# EAGLE board schaltplan_v2 (EAGLE 6.3)
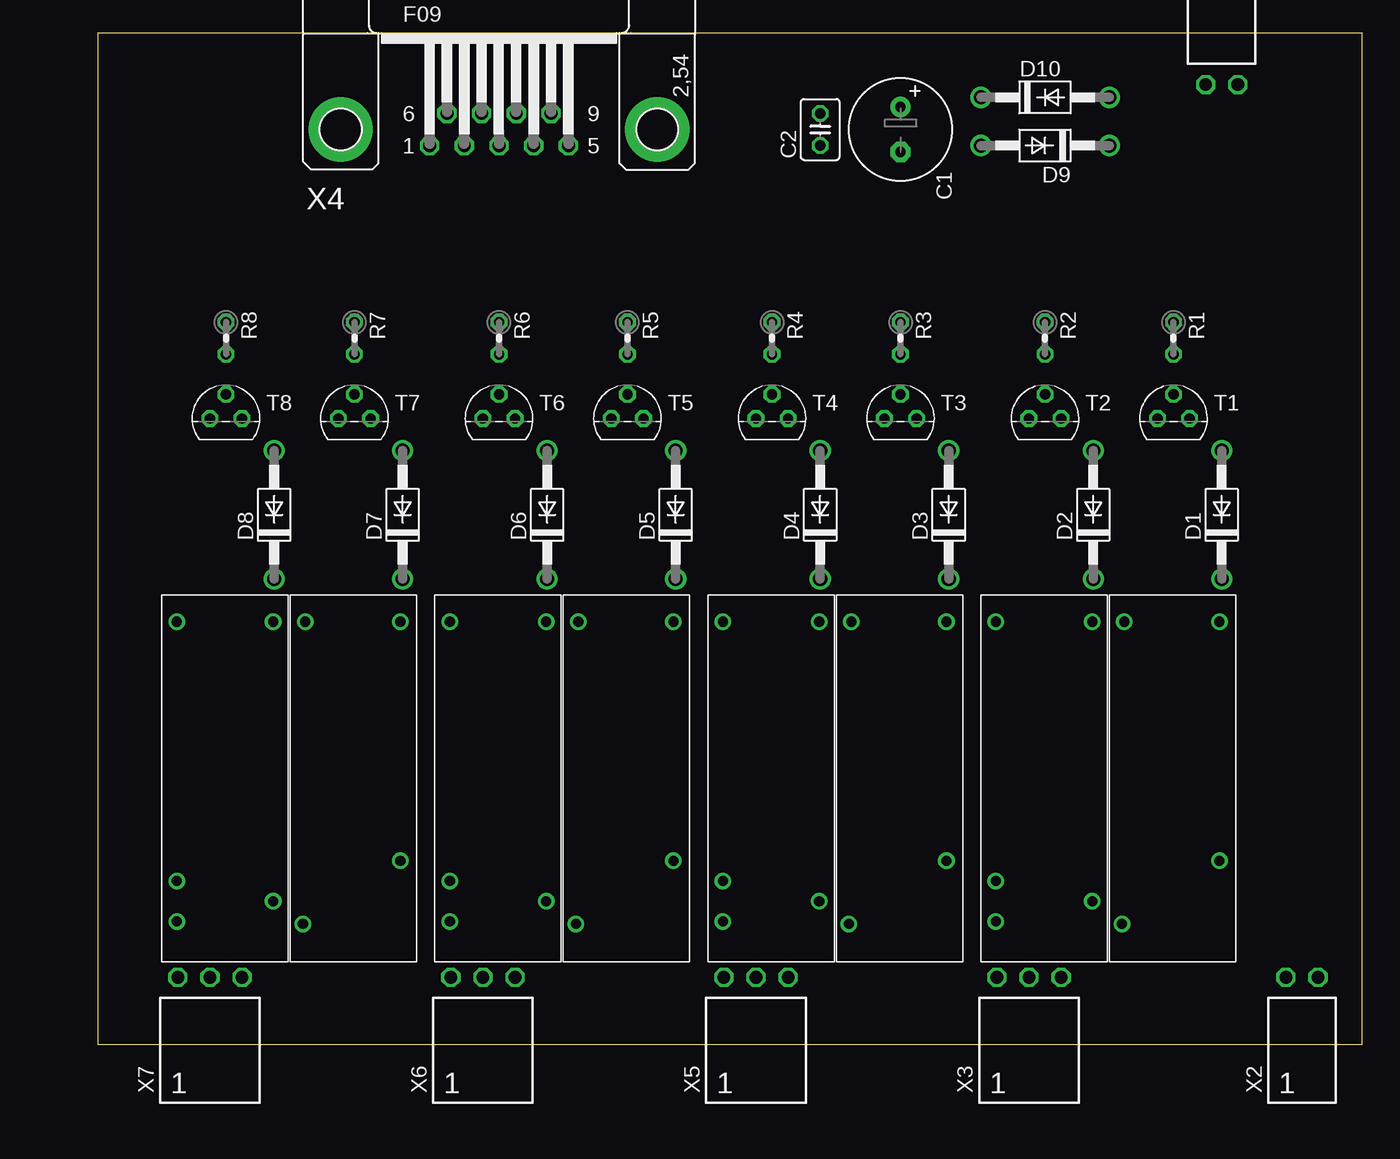
[diagram p0: board, top side]
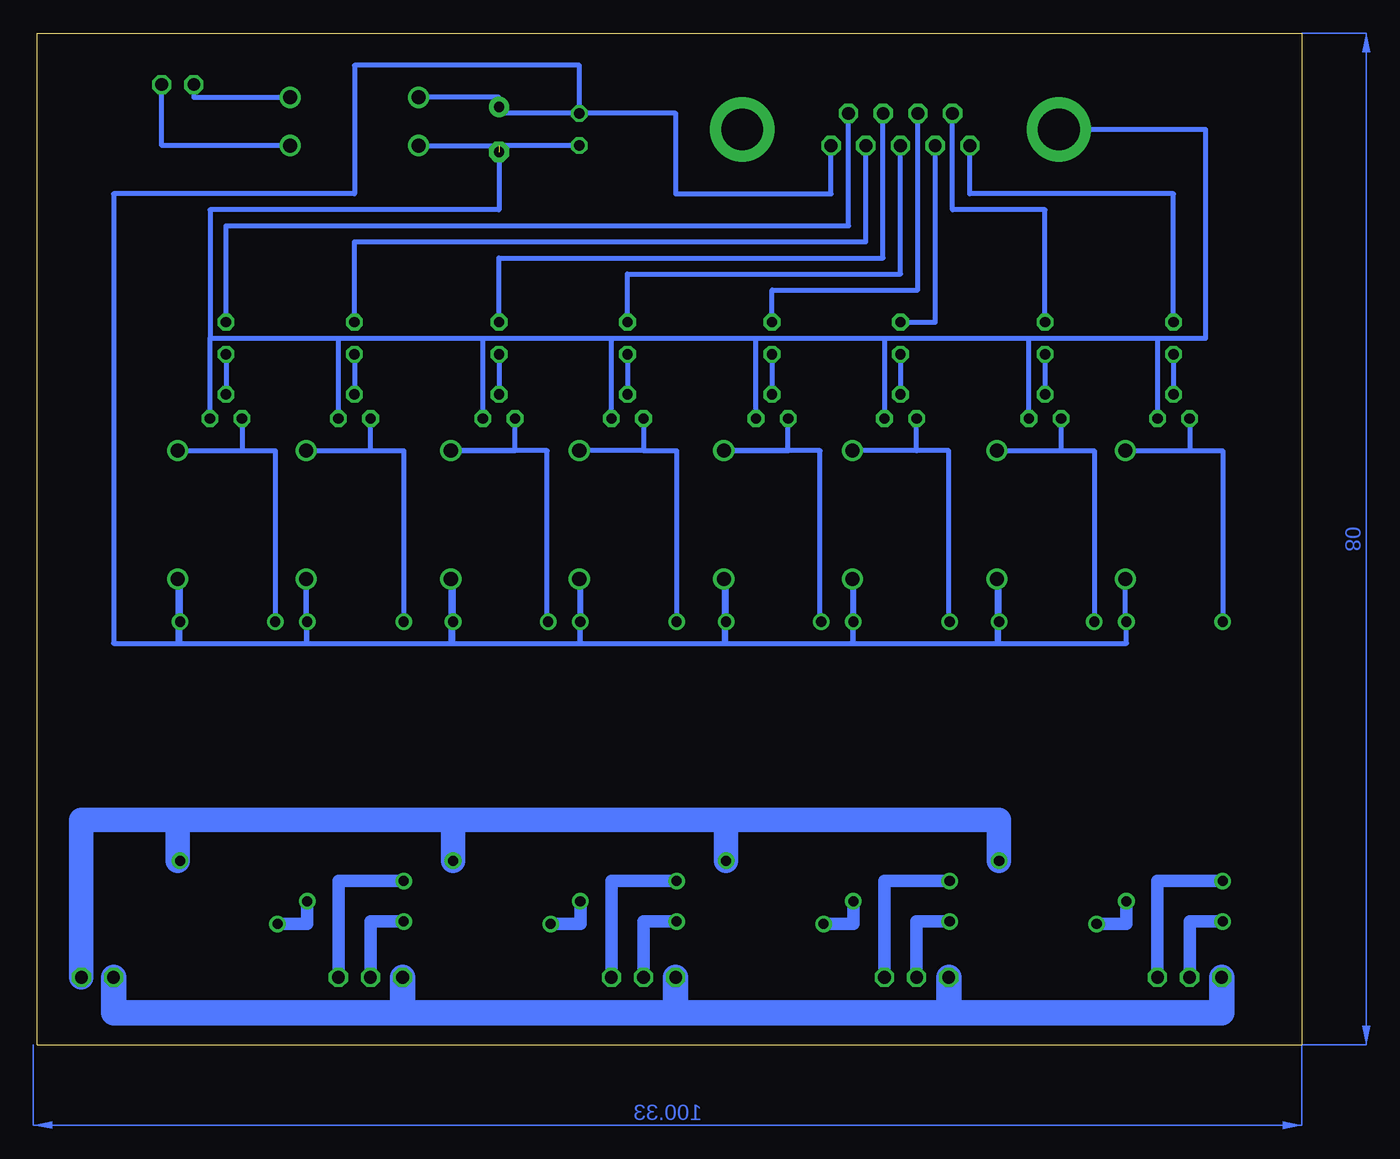
[diagram p1: board, bottom side, seen from below]

Size 100 x 80.01 mm. Coordinates in mm from the lower left corner, seen from the top.
Outline: 100,0.01 100,80.01 0,80.01 0,0.01
Outline: 100,0 0,0
Copper layers (1*16): Top 0.035mm / dielectric 1.5mm / Bottom 0.035mm
Design rules "default": minimum track width 10mil, minimum drill 24mil, track to track 8mil, track to pad 8mil, pad to pad 8mil, via to via 8mil, smd to smd 8mil, copper to edge 40mil, drill to drill 8mil, minimum pad ring 10mil, minimum via ring 8mil, stop-mask expansion 4mil, vias tented up to drill 0mil, thermal gap 10mil

## Footprints (pad centres in the part's own frame; a part is rotated, then mirrored left to right if it is on the bottom)
E3,5-8 = drill 0.813 pad 1.6: + -1.778,0 | drill 0.813 pad 1.6 octagon: - 1.778,0
C025-030X050 = drill 0.813 octagon: 1 -1.27,0; 2 1.27,0
DO41-10 = drill 1.118: A 5.08,0; C -5.08,0
0204V = drill 0.813 octagon: 1 -1.27,0; 2 1.27,0
TO92 = drill 0.813 octagon: 1 1.27,0; 2 0,1.905; 3 -1.27,0
JS_05_MN_KT = drill 0.8: P$1 2.1,1.19; P$2 2.1,8.71; P$3 21,8.71; P$4 26,1
JS_05_N_K = drill 0.8: P$1 2.1,1.19; P$2 2.1,8.81; P$3 24.2,8.81; P$4 22.6,1.19; P$5 25.8,1.19
SSW-102-02-S-S-RA = drill 1 pad 1.5 octagon: 1 -1.27,1.524; 2 1.27,1.524
SSW-103-02-S-S-RA = drill 1 pad 1.5 octagon: 1 -2.54,1.524; 2 0,1.524; 3 2.54,1.524
F09HP = drill 1.016 octagon: 1 -5.486,-1.27; 2 -2.743,-1.27; 3 0,-1.27; 4 2.743,-1.27; 5 5.486,-1.27; 6 -4.115,1.27; 7 -1.372,1.27; 8 1.372,1.27; 9 4.115,1.27 | drill 3.302 pad 5.08: G1 -12.522,0; G2 12.522,0

## Placement (x,y rotation side)
C1  [E3,5-8]  63.5,72.4 270 top
C2  [C025-030X050]  57.15,72.4 90 top
D1  1N4004  [DO41-10]  88.9,41.92 90 top
D2  1N4004  [DO41-10]  78.74,41.92 90 top
D3  1N4004  [DO41-10]  67.31,41.92 90 top
D4  1N4004  [DO41-10]  57.15,41.92 90 top
D5  1N4004  [DO41-10]  45.72,41.92 90 top
D6  1N4004  [DO41-10]  35.56,41.92 90 top
D7  1N4004  [DO41-10]  24.13,41.92 90 top
D8  1N4004  [DO41-10]  13.97,41.92 90 top
D9  1N4004  [DO41-10]  74.93,71.13 180 top
D10  1N4004  [DO41-10]  74.93,74.94 0 top
R1  [0204V]  85.09,55.89 270 top
R2  [0204V]  74.93,55.89 270 top
R3  [0204V]  63.5,55.89 270 top
R4  [0204V]  53.34,55.89 270 top
R5  [0204V]  41.91,55.89 270 top
R6  [0204V]  31.75,55.89 270 top
R7  [0204V]  20.32,55.89 270 top
R8  [0204V]  10.16,55.89 270 top
T1  2N3565  [TO92]  85.09,49.54 0 top
T2  2N3565  [TO92]  74.93,49.54 0 top
T3  2N3565  [TO92]  63.5,49.54 0 top
T4  2N3565  [TO92]  53.34,49.54 0 top
T5  2N3565  [TO92]  41.91,49.54 0 top
T6  2N3565  [TO92]  31.75,49.54 0 top
T7  2N3565  [TO92]  20.32,49.54 0 top
T8  2N3565  [TO92]  10.16,49.54 0 top
U$1  JS_05_MN_KT  [JS_05_MN_KT]  80.01,35.57 270 top
U$2  JS_05_N_K  [JS_05_N_K]  69.85,35.57 270 top
U$3  JS_05_MN_KT  [JS_05_MN_KT]  58.42,35.57 270 top
U$4  JS_05_N_K  [JS_05_N_K]  48.26,35.57 270 top
U$5  JS_05_MN_KT  [JS_05_MN_KT]  36.83,35.57 270 top
U$6  JS_05_N_K  [JS_05_N_K]  26.67,35.57 270 top
U$7  JS_05_MN_KT  [JS_05_MN_KT]  15.24,35.57 270 top
U$8  JS_05_N_K  [JS_05_N_K]  5.08,35.57 270 top
X1  SSW-102-02-S-S-RA  [SSW-102-02-S-S-RA]  88.9,77.48 180 top
X2  SSW-102-02-S-S-RA  [SSW-102-02-S-S-RA]  95.25,3.82 0 top
X3  SSW-103-02-S-S-RA  [SSW-103-02-S-S-RA]  73.66,3.82 0 top
X4  [F09HP]  31.75,72.4 0 top
X5  SSW-103-02-S-S-RA  [SSW-103-02-S-S-RA]  52.07,3.82 0 top
X6  SSW-103-02-S-S-RA  [SSW-103-02-S-S-RA]  30.48,3.82 0 top
X7  SSW-103-02-S-S-RA  [SSW-103-02-S-S-RA]  8.89,3.82 0 top

## Library data of the parts
C1 C2 = rcl
D1-D10 = diode
R1-R8 = resistor
T1-T8 = transistor
U$1-U$8 = n39
X1 X2 = con-samtec; MPN: SSW-102-02-S-S-RA; OC_FARNELL: unknown; OC_NEWARK: 11P9352
X3 X5-X7 = con-samtec; MPN: SSW-103-02-S-S-RA; OC_FARNELL: unknown; OC_NEWARK: 11P9368
X4 = con-subd; OC_FARNELL: unknown; OC_NEWARK: unknown

## Nets
N$1: X2.1 X3.1 X5.1 X6.1 X7.1
N$2: U$2.P$5 X3.2
N$3: U$2.P$4 X3.3
N$4: U$1.P$4 U$2.P$3
N$5: U$1.P$3 U$3.P$3 U$5.P$3 U$7.P$3 X2.2
N$6: D1.A T1.3 U$1.P$1
N$8: R1.2 T1.2
N$10: D9.C X1.1
N$11: R5.1 X4.7
N$12: D2.A T2.3 U$2.P$1
N$13: R6.2 T6.2
N$14: R6.1 X4.2
N$15: R8.1 X4.1
N$16: U$4.P$5 X5.2
N$17: U$4.P$4 X5.3
N$18: U$3.P$4 U$4.P$3
N$19: C1.- C2.1 D9.A T1.1 T2.1 T3.1 T4.1 T5.1 T6.1 T7.1 T8.1 X4.G1
N$20: D3.A T3.3 U$3.P$1
N$21: R7.1 X4.6
N$22: R3.2 T3.2
N$23: R4.1 X4.3
N$24: C1.+ C2.2 D1.C D2.C D3.C D4.C D5.C D6.C D7.C D8.C D10.C U$1.P$2 U$2.P$2 U$3.P$2 U$4.P$2 U$5.P$2 U$6.P$2 U$7.P$2 U$8.P$2 X4.5
N$25: D4.A T4.3 U$4.P$1
N$26: R2.1 X4.4
N$27: R2.2 T2.2
N$28: R4.2 T4.2
N$29: D10.A X1.2
N$30: U$6.P$5 X6.2
N$31: U$6.P$4 X6.3
N$32: U$5.P$4 U$6.P$3
N$34: D5.A T5.3 U$5.P$1
N$36: R5.2 T5.2
N$37: R3.1 X4.8
N$38: R1.1 X4.9
N$39: D6.A T6.3 U$6.P$1
N$40: R8.2 T8.2
N$42: U$8.P$5 X7.2
N$43: U$8.P$4 X7.3
N$44: U$7.P$4 U$8.P$3
N$46: D7.A T7.3 U$7.P$1
N$48: R7.2 T7.2
N$51: D8.A T8.3 U$8.P$1

## Tracks (layer width: path | path; a pad name or v marks a point on that pad's centre or on a via)
N$1
  Bottom 0.406: 71.12,2.55 X3.1 | 49.53,2.55 X5.1 | 27.94,2.55 27.94,5.09 X6.1
  Bottom 2: X2.1 93.98,2.55 71.12,2.55 | X3.1 71.12,2.55 | 71.12,2.55 49.53,2.55 | X5.1 49.53,2.55 | 49.53,2.55 27.94,2.55 | X6.1 27.94,2.55 | 27.94,2.55 6.35,2.55 X7.1
N$2
  Bottom 1: U$2.P$5 73.66,9.77 X3.2
N$3
  Bottom 1: U$2.P$4 76.2,12.97 X3.3
N$4
  Bottom 1: U$1.P$4 78.66,9.57 U$2.P$3
N$5
  Bottom 0.406: 88.9,14.57 U$1.P$3 88.9,14.57 | 88.9,14.57 88.9,17.79 | 67.13,17.79 67.31,17.79 67.31,14.57 U$3.P$3 | 45.54,17.79 45.72,17.79 45.72,14.57 U$5.P$3
  Bottom 1.93: 88.9,17.79 96.52,17.79 X2.2 | 88.9,14.57 88.9,17.79 | 88.9,17.79 67.31,17.79 45.72,17.79 23.95,17.79 U$7.P$3 | 67.13,17.79 U$3.P$3 | 45.54,17.79 U$5.P$3
N$6
  Bottom 0.406: D1.A 83.82,47 | 83.82,47 81.2,47 U$1.P$1 | T1.3 83.82,47
N$8
  Bottom 0.406: R1.2 T1.2
N$10
  Bottom 0.406: D9.C 90.17,71.13 X1.1
N$11
  Bottom 0.406: R5.1 41.91,59.7 30.38,59.7 X4.7
N$12
  Bottom 0.406: T2.3 73.66,47 D2.A 71.04,47 U$2.P$1
N$13
  Bottom 0.406: R6.2 T6.2
N$14
  Bottom 0.406: R6.1 29.01,57.16 X4.2
N$15
  Bottom 0.406: R8.1 10.16,67.32 26.26,67.32 X4.1
N$16
  Bottom 1: U$4.P$5 52.07,9.77 X5.2
N$17
  Bottom 1: U$4.P$4 54.61,12.97 X5.3
N$18
  Bottom 1: U$3.P$4 57.07,9.57 U$4.P$3
N$19  (1 unrouted)
  Bottom 0.406: C2.1 63.5,71.13 | D9.A 63.5,71.13 | 63.5,71.13 63.5,66.05 86.36,66.05 86.36,55.89 | 86.36,55.89 76.2,55.89 | 76.2,55.89 64.77,55.89 | 64.77,55.89 54.61,55.89 | 54.61,55.89 43.18,55.89 | 43.18,55.89 33.02,55.89 | 33.02,55.89 T6.1 | T5.1 43.18,55.89 | T4.1 54.61,55.89 | T3.1 64.77,55.89 | T2.1 76.2,55.89 | T1.1 86.36,55.89 | 33.02,55.89 21.59,55.89 | 21.59,55.89 11.43,55.89 | 11.43,55.89 T8.1 | T7.1 21.59,55.89 | 11.43,55.89 7.62,55.89 7.62,72.4 X4.G1
N$20
  Bottom 0.406: U$3.P$1 59.69,33.47 59.69,47 D3.A 62.23,47 T3.3
N$21
  Bottom 0.406: R7.1 20.32,66.05 27.64,66.05 X4.6
N$22
  Bottom 0.406: R3.2 T3.2
N$23
  Bottom 0.406: R4.1 53.34,60.97 31.75,60.97 X4.3
N$24
  Bottom 0.406: D8.C 13.97,33.47 U$8.P$2 13.89,31.76 23.95,31.76 | C2.2 49.53,73.67 49.53,67.32 37.24,67.32 X4.5 | C2.2 63.5,73.67 C1.+ 63.5,74.94 D10.C | C2.2 57.15,77.48 74.93,77.48 74.93,67.32 93.98,67.32 93.98,31.76 88.9,31.76 | 88.9,31.76 88.72,31.76 | 88.72,31.76 U$1.P$2 88.72,36.84 D1.C 88.9,31.76 | 88.72,31.76 78.74,31.76 | 78.74,31.76 78.66,31.76 | 78.66,31.76 U$2.P$2 78.74,33.47 D2.C 78.74,31.76 | 78.66,31.76 67.31,31.76 | 67.31,31.76 67.13,31.76 | 67.13,31.76 U$3.P$2 67.13,36.84 D3.C 67.31,31.76 | 67.13,31.76 57.15,31.76 | 57.15,31.76 57.07,31.76 | 57.07,31.76 U$4.P$2 57.07,36.84 D4.C 57.15,31.76 | 57.07,31.76 45.72,31.76 | 45.72,31.76 45.54,31.76 | 45.54,31.76 U$5.P$2 45.54,36.84 D5.C 45.72,31.76 | 45.54,31.76 35.56,31.76 | 35.56,31.76 35.48,31.76 | 35.48,31.76 U$6.P$2 35.48,36.84 D6.C 35.56,31.76 | 35.48,31.76 24.13,31.76 | 24.13,31.76 23.95,31.76 | 23.95,31.76 U$7.P$2 23.95,36.84 D7.C 24.13,31.76
N$25
  Bottom 0.406: T4.3 52.07,47 | 52.07,47 D4.A | 52.07,47 49.45,47 U$4.P$1
N$26
  Bottom 0.406: R2.1 74.93,63.51 34.49,63.51 X4.4
N$27
  Bottom 0.406: R2.2 T2.2
N$28
  Bottom 0.406: R4.2 T4.2
N$29
  Bottom 0.406: X1.2 87.63,74.94 D10.A
N$30
  Bottom 1: U$6.P$5 30.48,9.77 X6.2
N$31
  Bottom 1: U$6.P$4 33.02,12.97 X6.3
N$32
  Bottom 1: U$5.P$4 35.48,9.57 U$6.P$3
N$34
  Bottom 0.406: U$5.P$1 38.1,33.47 38.1,47 D5.A 40.64,47 T5.3
N$36
  Bottom 0.406: R5.2 T5.2
N$37
  Bottom 0.406: R3.1 63.5,62.24 33.12,62.24 X4.8
N$38
  Bottom 0.406: R1.1 85.09,64.78 35.87,64.78 X4.9
N$39
  Bottom 0.406: U$6.P$1 27.94,33.47 27.94,47 30.48,47 | 30.48,47 D6.A | 30.48,47 T6.3
N$40
  Bottom 0.406: R8.2 T8.2
N$42
  Bottom 1: U$8.P$5 8.89,9.77 X7.2
N$43
  Bottom 1: U$8.P$4 11.43,12.97 X7.3
N$44
  Bottom 1: U$7.P$4 13.89,9.57 U$8.P$3
N$46
  Bottom 0.406: D7.A 19.05,47 | 19.05,47 16.43,47 U$7.P$1 | T7.3 19.05,47
N$48
  Bottom 0.406: R7.2 T7.2
N$51
  Bottom 0.406: D8.A 8.89,47 | T8.3 8.89,47 | 8.89,47 6.27,47 U$8.P$1
(copper drawn outside any net)
  shapes: Bottom area x2